# Altium PCB CopterControl Mag & Pressure.PcbDoc
Units mm, origin at the board's own origin, x right, y up, seen from the top; angles counter-clockwise.
Board outline 14.63 x 15.04 mm, 2 copper layers (Top Layer, Bottom Layer); 16 components, 9 nets, 59 pads, 13 vias.
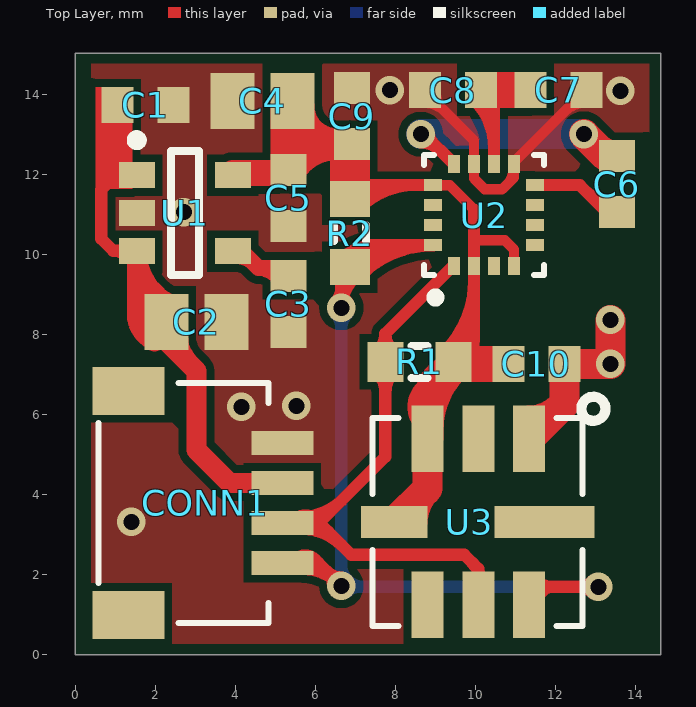
[diagram p0: Top Layer view]
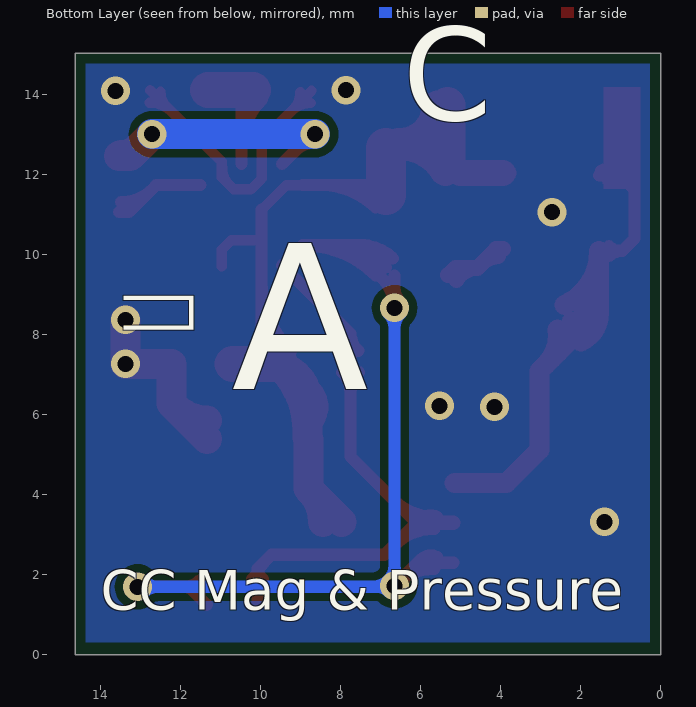
[diagram p1: Bottom Layer view, seen from below]
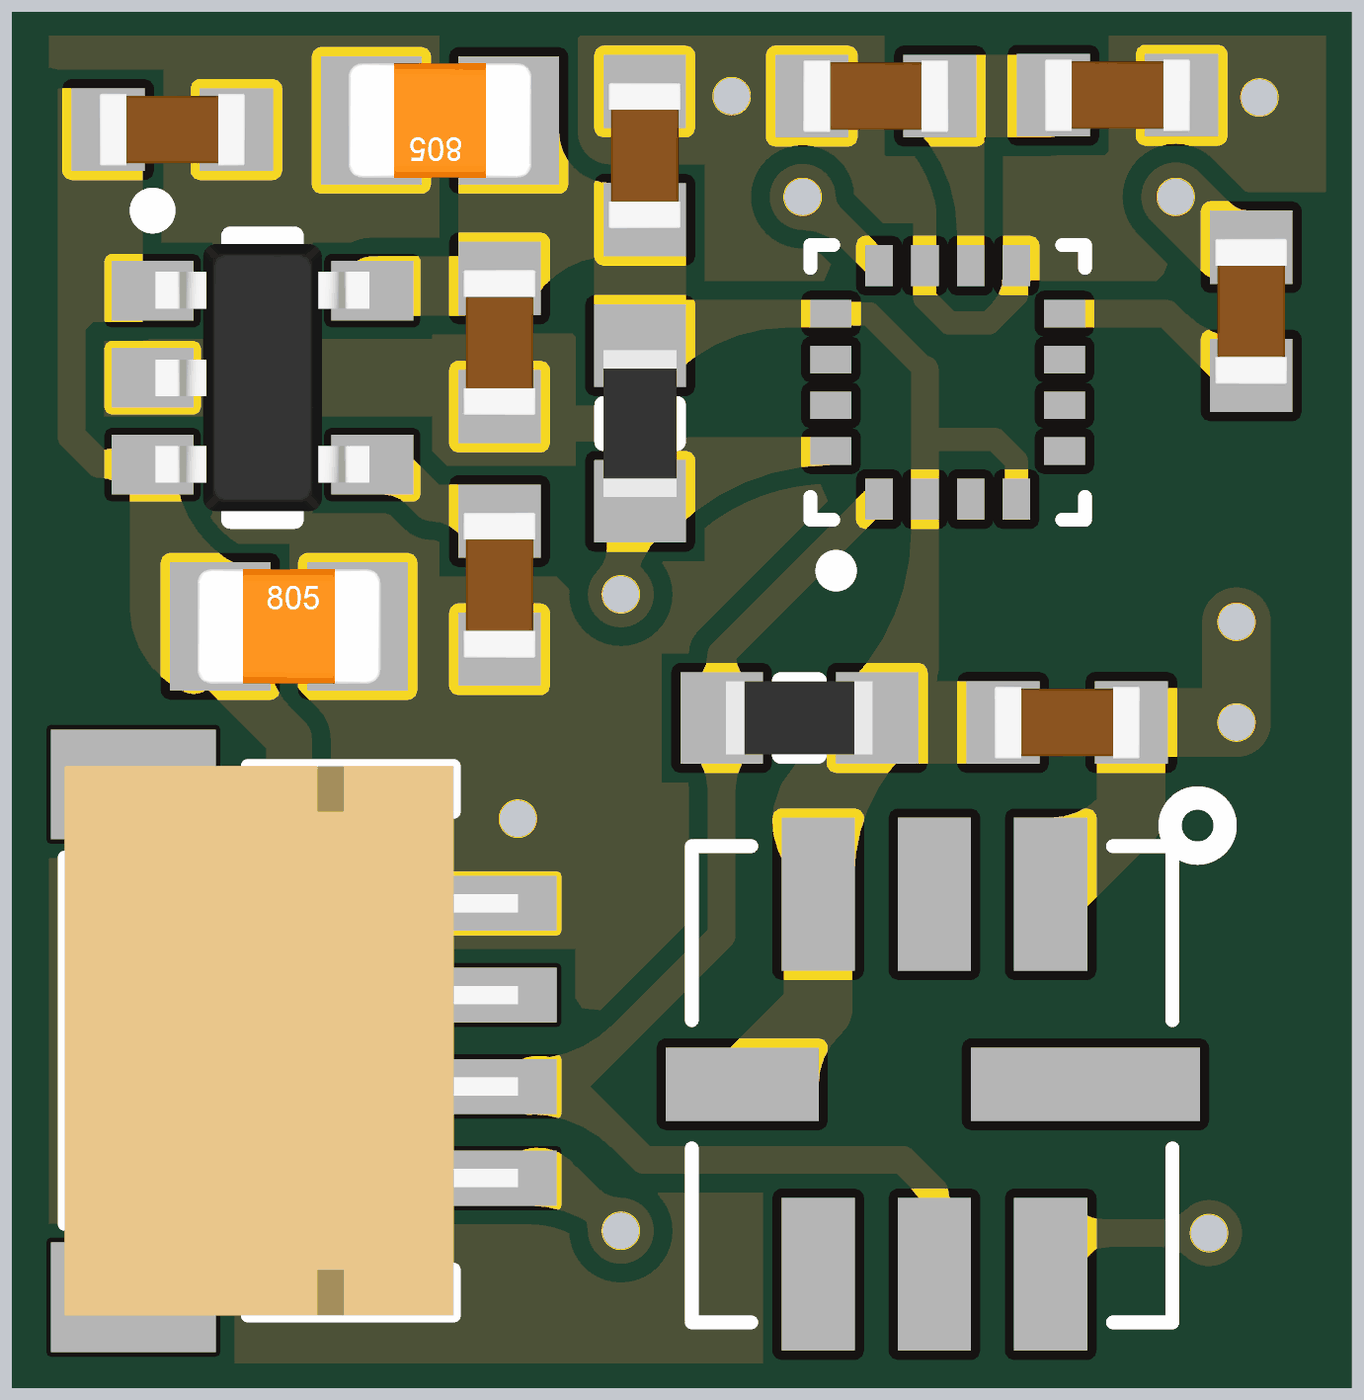
[diagram p2: 3D render of the assembled board from above, using the file's embedded part models]

## Layer stack, top to bottom
Top Layer: signal copper 0.0356
Dielectric: core 0.32, FR-4, Dk 4.8
Bottom Layer: signal copper 0.0356

## Board outline
0,0 0,15.037 14.63,15.037 14.63,0

## Design rules (kind name [scope] priority, off if disabled: settings)
Clearance "Mag  Clearance" [(HasFootprint('LPCC-16'))] p1: gap=0.152
Clearance [All] p2: gap=0.203
MinimumSolderMaskSliver [All] p1: minsoldermaskwidth=0.076
PlaneConnect [All] p1: planeconnectstyle=Direct reliefexpansion=0.508 reliefentries=4 reliefconductorwidth=0.254 reliefairgap=0.254
PolygonConnect [All] p1: connectstyle=Direct reliefconductorwidth=0.254 reliefentries=4 polygonreliefangle="90 Angle"
RoutingVias [All] p1: holewidth=0.4 width=0.72 viastyle="Through Hole" minholewidth=0.4 minwidth=0.72 maxholewidth=0.711 maxwidth=1.27
SilkToSilkClearance [All] p1: silktosilkclearance=0.152
SilkscreenOverComponentPads [All] p1: minsilkscreentomaskgap=0.076
SolderMaskExpansion [All] p1: expansion=0.102
Width [All] p1: maxlimit=1 minlimit=0.254 preferedwidth=0.254 minimp=50.000000 maximp=50.000000 favimp=50.000000
24 further rules are at their usual default settings.

## Components (designator, comment, footprint, x,y, rotation, side; value= is the part's Value field where it differs from the comment)
C1 "Cap603" CAP603L 1.75,13.75 r0 top
C2 "Cap805" CAP805L 3.025,8.325 r0 top
C3 "Cap603" CAP603L 5.325,8.775 r270 top
C4 "Cap805" CAP805L 4.675,13.85 r180 top
C5 "Cap603" CAP603L 5.325,11.425 r270 top
C6 "Cap603" CAP603L 13.535,11.765 r270 top
C7 "Cap603" CAP603L 12.075,14.125 r0 top
C8 "Cap603" CAP603L 9.435,14.115 r180 top
C9 "Cap603" CAP603L 6.91,13.465 r90 top
C10 "Cap603" CAP603L 11.525,7.275 r0 top
CONN1 "JST-SH 4-pin Side Entry Socket" "JST SH 4 Pin Side Entry" 0.575,3.8 r270 top
R1 "Res603" RES603N 8.6,7.325 r0 top
R2 "Res603" RES603N 6.86,10.54 r90 top
U1 "LP2985-3.3" SOT23-5L 2.735,11.04 r0 top
U2 "HMC5883L" LPCC-16 10.22,10.989 r90 top
U3 "BMP085" BMP085 10.075,3.325 r270 top

## Footprints (in the part's own frame and the unit in brackets; to place one, negate y for a bottom-side part, rotate by r counter-clockwise, add the part's x,y. Pads: shape width x height; smd on the part's side, far side on the other; paste and mask are expansions set on the pad)
BMP085 [mm]
  rect 1.67x0.8 smd: 1(-2.075,1.27) 2(-2.075,0) 3(-2.075,-1.27) 5(2.075,-1.27) 6(2.075,0) 7(2.075,1.27)
  rect 0.8x1.67 smd: 4(0,-2.1)
  rect 0.8x2.5 smd: 8(0,1.65)
  silkscreen extent -3.13,-2.65 2.6,3.18, body extent -2.5,-2.53 2.5,2.47, height 1.24
CAP603L [mm] "Chip Capacitor, Body 1.6x0.8mm, IPC High Density"
  rect 0.8x0.9 smd: 1(-0.7,0) 2(0.7,0)
  body extent -0.8,-0.4 0.8,0.4, height 0.77
CAP805L [mm] "Chip Capacitor, Body 2.0x1.3mm, IPC High Density"
  rect 1.1x1.4 smd: 1(-0.75,0) 2(0.75,0)
  body extent -1,-0.62 1,0.63, height 0.78
"JST SH 4 Pin Side Entry" [mm] "SM04B-SRSS-TB"
  rect 1.2x1.8 smd paste+0 mask+0.051: 0(-2.8,0.75) 0(2.8,0.75)
  rect 0.6x1.55 smd paste+0 mask+0.051: 1(-1.5,4.6) 2(-0.5,4.6) 3(0.5,4.6) 4(1.5,4.6)
  silkscreen extent -3,0 3,4.25, body extent -3,0 3,4.95, height 2.92
LPCC-16 [mm] "Honeywell 16 lead LPCC pakcage"
  rect 0.45x0.3 smd: 1(-1.275,0.75) 2(-1.275,0.25) 3(-1.275,-0.25) 4(-1.275,-0.75) 9(1.275,-0.75) 10(1.275,-0.25) 11(1.275,0.25) 12(1.275,0.75)
  rect 0.3x0.45 smd: 5(-0.75,-1.275) 6(-0.25,-1.275) 7(0.25,-1.275) 8(0.75,-1.275) 13(0.75,1.275) 14(0.25,1.275) 15(-0.25,1.275) 16(-0.75,1.275)
  silkscreen extent -2.16,-1.5 1.5,1.5, body extent -1.5,-1.5 1.5,1.5, height 0.9
RES603N [mm] "Chip Resistor, Body 1.6x0.8mm, IPC Medium Density"
  rect 0.9x1 smd: 1(-0.85,0) 2(0.85,0)
  silkscreen extent -0.2,-0.4 0.2,0.4, body extent -0.8,-0.4 0.8,0.4, height 0.44
SOT23-5L [mm] "SOT23, 5-Leads, Body 2.9x1.6mm, Pitch 0.95mm, Lead Span 2.8mm, IPC High Density"
  rect 0.9x0.65 smd mask+0.076: 1(-1.2,0.95) 2(-1.2,0) 3(-1.2,-0.95) 4(1.2,-0.95) 5(1.2,0.95)
  silkscreen extent -1.32,-1.55 0.35,1.95, body extent -1.17,-1.46 1.17,1.46, height 0.97

## Part data
C1 C2 C3 C4 C5 C6 C7 C8 C9 C10: "Capacitor SMD"
R1 R2: "Resistor SMD"
U1: "3.3V 150mA LDO Regulator"
U2: "IC, Magnetometer, 3 axis, +/- 8 Oe, I2C, 160Hz"
U3: "Barometric Pressure Sensor"

## Via types
v1: diameter 0.72, hole 0.4, Top Layer to Bottom Layer, tented both sides, 13 vias

## Nets (pads, with @x,y where several pads share a name; then routed paths per layer and width w, separated by ;. In a path a pad name is that pad's centre, name@x,y a point inside that pad or via, vN(x,y) a via of type N, cw(c..) or ccw(c..) an arc to the next point about the centre after c; other vN are vias at no path point)
+3.3V: C4.1 C5.1 C9.1 C10.1 R1.2 R2.2 U1.5 U2.2 U2.4 U2.13 U3.3 U3.4 | length 36.4
  Top Layer w0.254: U2.13 9.361,11.739 9.97,11.13 ; U2.2@9.96,9.724 U2.2 ; 9.97,10.365 10.735,10.365 10.97,10.13 U2.4
  Top Layer w0.3: R2.2@6.885,11.739 U2.13 ; R2.2@6.91,11.39 cw(c7.753,10.548) 7.753,11.739 ; R2.2@7.123,11.178 cw(c8.477,9.823) 8.477,11.739 ; R1.2@9.238,7.587 ccw(c7.469,9.356) 9.97,9.356 ; R1.2 9.97,7.845 ; R1.2@9.45,7.375 ccw(c8.194,8.631) 9.97,8.631 ; R1.2@9.482,7.673 ccw(c9.547,8.269) 9.97,7.845 ; R1.2@9.662,7.163 ccw(c8.918,7.907) 9.97,7.907 ; R1.2@9.75,7.375 cw(c10.354,7.375) 9.927,7.802 ; 9.97,11.13 9.97,10.365 U2.2 9.97,7.845
  Top Layer w0.5: U1.5@3.854,12.046 U1.5@3.935,11.965
  Top Layer w0.6: R2.2@6.86,11.49 R2.2@6.91,11.44
  Top Layer w0.65: U1.5@3.935,12.04 C5.1@5.015,12.04
  Top Layer w0.75: U3.4 8.805,4.155 U3.3 8.825,5.42 8.825,6.55 ; U3.4@8.435,3.325 cw(c9.546,3.325) 8.76,4.11 ; U3.3@8.823,5.853 cw(c9.175,6.2) 8.825,6.55 ; U3.3@8.825,5.585 cw(c11.14,5.585) R1.2@9.503,7.222 ; 8.825,6.318 cw(c9.754,6.318) R1.2@9.473,7.204 ; U3.3@8.83,5.835 cw(c10.568,5.835) R1.2@9.339,7.064 ; R1.2 9.45,7.175 8.825,6.55
  Top Layer w0.8: 5.36,12.765 C9.1@6.535,12.765 ; C5.1@5.375,12.125 cw(c6.535,11.394) C9.1@6.535,12.765 ; C4.1@5.575,13.703 ccw(c6.535,13.726) C9.1@6.535,12.765
  Top Layer w0.9: C5.1@5.325,12.2 C4.1@5.325,13.751 ; R1.2@9.5,7.275 C10.1@10.7,7.275
  Top Layer w1: R2.2@6.86,11.49 C9.1@6.86,12.665
GND: C1.2 C2.2 C3.2 C4.2 C5.2 C7.2 C8.2 C9.2 C10.2 CONN1.1 U1.2 U2.9 U2.11 U3.1 | length 14.8
  Top Layer w0.254: C8.2@8.723,14.103 9.97,12.855 U2.11 9.97,11.905 10.236,11.639 10.67,11.639 10.97,11.939 U2.9 10.97,12.325 C7.2@12.76,14.115 ; C8.2@8.735,13.792 cw(c8.735,13.073) 9.244,13.581 ; C8.2@9.008,14.065 ccw(c9.607,14.065) 9.184,13.642 ; 10.795,11.764 ccw(c10.423,12.137) U2.9@10.948,12.187 ; 12.215,13.57 cw(c12.775,13.011) C7.2@12.775,13.802 ; 12.348,13.703 ccw(c11.975,14.075) C7.2@12.502,14.075
  Top Layer w0.75: U3.1 12.225,6.28 C10.2 v1(13.375,7.275) v1(13.375,8.375) ; U3.1@11.345,5.86 ccw(c11.345,6.971) 12.13,6.185
  other v1: 1.4,3.325 4.15,6.2 5.525,6.225 2.71,11.065 13.625,14.1 7.86,14.115
NetC1_1: C1.1 C2.1 CONN1.2 U1.1 U1.3 | length 21.5
  Top Layer w0.254: CONN1.2@5.15,4.3 CONN1.2@5.2,4.3
  Top Layer w0.305: 0.818,11.793 cw(c1.1,11.511) U1.1@1.317,11.845 ; 0.965,11.94 cw(c1.405,11.5) U1.1@1.412,12.122 ; 0.97,10.1 cw(c0.97,9.65) U1.3@1.288,9.968 ; 1.017,10.1 ccw(c1.017,10.483) U1.3@1.288,10.212 ; 1.084,12.059 cw(c1.309,11.834) U1.1@1.482,12.101 ; U1.1@1.284,11.873 ccw(c1.015,11.624) 1.015,11.99 ; U1.1@1.284,12.107 cw(c1.015,12.356) 1.015,11.99 ; U1.3@1.525,10.1 0.95,10.1 0.65,10.4 0.65,11.625 1.015,11.99 ; U1.1 1.015,11.99
  Top Layer w0.5: 1.535,8.537 ccw(c2.303,8.537) C2.1@1.985,7.838 ; 1.535,9.313 ccw(c2.656,9.313) C2.1@2.192,8.293 ; U1.3 ccw(c3.01,10.09) C2.1@2.399,8.748 ; U1.3 1.535,8.59 2.725,7.4 ; C2.1@2.225,8.325 2.225,7.9 2.725,7.4 ; C2.1@2.572,8.133 ccw(c3.588,7.988) 2.862,7.263 ; CONN1.2@5.15,4.3 3.85,4.3 3.025,5.125 3.025,7.1 2.725,7.4 ; C2.1@2.522,8.005 ccw(c2.808,7.808) 2.562,7.563 ; C2.1@2.522,8.005 ccw(c2.808,7.808) 2.562,7.563 ; C2.1@2.522,8.005 ccw(c2.808,7.808) 2.562,7.563
NetC3_1: C3.1 U1.4 | length 2.7
  Top Layer w0.4: U1.4@3.935,10.14 4.11,10.14 4.575,9.675 ; U1.4@4.06,9.965 cw(c4.06,9.423) 4.443,9.807 ; C3.1@5.103,9.373 ccw(c4.575,9.063) 4.575,9.675 ; C3.1@5.31,9.49 5.126,9.675 4.575,9.675
NetC6_1: C6.1 U2.12 | length 7.5
  Top Layer w0.305: v1@8.635,12.808 cw(c8.635,12.104) 9.133,12.601 ; v1(8.635,13.015) 8.719,13.015 U2.12@9.465,12.27 ; v1@8.843,13.015 ccw(c9.141,13.015) 8.93,12.804
  Top Layer w0.75: v1(12.71,13.015) 13.26,12.465 C6.1 ; 13.059,12.667 ccw(c13.485,13.094) C6.1@13.485,12.49
  Bottom Layer w0.75: v1(8.635,13.015) v1(12.71,13.015)
NetC6_2: C6.2 U2.8 | length 3.4
  Top Layer w0.254: C6.2@13.285,11.065 C6.2@13.285,11.29
  Top Layer w0.3: U2.8 12.611,11.739 13.285,11.065 C6.2 ; 12.717,11.633 ccw(c13.485,12.402) C6.2@13.485,11.315
NetC7_1: C7.1 C8.1 U2.10 | length 5.2
  Top Layer w0.3: C8.1@9.959,13.888 cw(c8.723,12.653) 10.47,12.653 ; C8.1@10.171,14.101 cw(c9.447,13.377) 10.47,13.377 ; U2.10 C8.1@10.47,14.115
  Top Layer w0.9: C8.1@10.185,14.115 10.47,14.115 C7.1@11.31,14.115
NetCONN1_3: CONN1.3 R1.1 U2.1 U3.6 | length 22
  Top Layer w0.305: CONN1.3@5.578,3.44 cw(c5.756,3.095) 6.031,3.369 ; CONN1.3@5.65,3.143 ccw(c5.65,3.85) 6.15,3.35 ; CONN1.3@5.65,3.152 cw(c5.65,1.71) 6.67,2.73 ; CONN1.3@5.65,3.448 ccw(c5.65,4.89) 6.67,3.87 ; CONN1.3@5.65,3.457 cw(c5.65,2.75) 6.15,3.25 ; CONN1.3@5.718,3.169 cw(c5.957,2.707) 6.325,3.075 ; R1.1@7.54,7.065 cw(c7.032,6.557) 7.75,6.557 cw(c8.468,6.557) R1.1@7.96,7.065 ; R1.1@7.556,7.6 ccw(c7.189,8.025) 7.75,8.025 ; R1.1@7.944,7.6 cw(c8.311,8.025) 7.75,8.025 ; U2.1@9.463,9.738 7.75,8.025 ; 9.923,2.302 cw(c9.403,1.781) U3.6@10.132,1.677 ; U3.6@9.937,1.89 ccw(c9.762,2.15) 10.075,2.15 ; U3.6 10.075,2.15 ; U3.6@10.213,1.89 cw(c10.388,2.15) 10.075,2.15 ; 7.75,8.025 R1.1 7.75,4.95 6.1,3.3 6.9,2.5 9.725,2.5 10.075,2.15
  Top Layer w0.356: CONN1.3 6.1,3.3
NetCONN1_4: CONN1.4 R2.1 U2.16 U3.7 | length 36.7
  Top Layer w0.254: CONN1.4 CONN1.4@5.2,2.3
  Top Layer w0.305: CONN1.4 6.075,2.3 v1(6.65,1.725) ; CONN1.4@5.575,2.438 cw(c5.745,2.124) 5.998,2.377 ; CONN1.4@5.65,2.152 cw(c5.65,0.77) v1@6.627,1.748 ; CONN1.4@5.65,2.457 cw(c5.65,1.811) 6.107,2.268 ; CONN1.4@5.72,2.17 cw(c5.948,1.748) 6.287,2.088 ; CONN1.4@5.754,2.196 cw(c6.006,1.944) 6.006,2.3 cw(c6.006,2.656) CONN1.4@5.754,2.404 ; v1@6.442,1.725 ccw(c5.941,1.725) 6.296,2.079 ccw(c6.65,2.434) v1@6.65,1.933 ; v1@6.503,8.822 ccw(c6.149,9.176) 6.65,9.176 ccw(c7.151,9.176) v1@6.797,8.822 ; v1@6.65,8.662 cw(c7.735,8.662) R2.1@7.009,9.469 ; v1(6.65,8.675) R2.1@6.65,9.48 ; R2.1@6.689,9.91 cw(c7.48,9.124) 7.48,10.239 ; R2.1 7.409,10.239 ; R2.1@6.905,9.695 cw(c8.213,8.396) 8.213,10.239 ; R2.1@6.91,9.988 ccw(c6.91,10.586) 7.333,10.163 ; R2.1@7.121,9.48 cw(c8.945,7.668) U2.16 7.409,10.239 ; R2.1@7.207,9.708 cw(c7.9,9.749) 7.409,10.239 ; U3.7 11.795,1.7 ; U3.7@11.52,1.51 cw(c11.979,1.051) 11.979,1.7 ; U3.7@11.52,1.86 ccw(c11.907,2.247) 11.907,1.7 ; U3.7@11.547,1.828 ccw(c11.795,2.004) 11.795,1.7 ; U3.7@11.561,1.563 cw(c11.795,1.431) 11.795,1.7 ; v1@12.928,1.553 ccw(c12.574,1.199) 12.574,1.7 ccw(c12.574,2.201) v1@12.928,1.847 ; v1(13.075,1.7) 11.795,1.7
  Bottom Layer w0.305: v1@6.503,1.872 ccw(c6.149,2.226) 6.65,2.226 ccw(c7.151,2.226) 6.797,1.872 ccw(c7.212,2.287) 7.212,1.7 ; v1@6.503,8.528 cw(c6.149,8.174) 6.65,8.174 cw(c7.151,8.174) v1@6.797,8.528 ; v1(6.65,8.675) v1(6.65,1.725) 6.675,1.7 v1(13.075,1.7) ; v1@6.797,1.578 cw(c7.091,1.284) 7.091,1.7 ; v1@12.928,1.553 ccw(c12.574,1.199) 12.574,1.7 ccw(c12.574,2.201) v1@12.928,1.847
pads on no net: CONN1.0 U2.3 U2.5 U2.6 U2.7 U2.14 U2.15 U3.2 U3.5 U3.8

## Polygon pours and split planes (outlines as drawn)
GND on Top Layer "Bottom Layer-No Net" (solid, remove dead copper, pour order 1000): 0.4,14.775 0.4,0.275 11.103,0.275 11.103,11.084 14.35,11.084 14.35,14.775
GND on Bottom Layer "Bottom Layer-No1" (solid, remove dead copper, pour order 1001): 14.37,14.775 0.275,14.775 0.275,0.318 14.37,0.318

## Other copper
Top Layer:
  rectangle net NetC1_1: 0.5,11.65 1.425,14.2
  pour cut-out: 9.6,12.725 10.825,12.725 10.825,11.675 11.125,12.1 11.495,12.094 11.225,10.6 10.35,10.6 9.6,12.05
  pour cut-out: 8.9,2.65 11.8,2.65 11.75,2.7 11.75,6.75 8.9,6.75

## Silkscreen, mask and mechanical layers (free items; w line width, h text height)
Bottom Overlay:
  text "C" at 6.45,12.6 h4
  text "" at 10.925,9.075 h4 r270
  text "A" at 10.725,5.325 h6.86
  text "CC Mag & Pressure" at 14,0.8 h1.7
Mechanical 1:
  the board outline again, w0.051